# Altium PCB B302BA-PCIe.PcbDoc
Units mm, origin at the board's own origin, x right, y up, seen from the top; angles counter-clockwise.
Board outline 30 x 63 mm, 4 copper layers (Top Layer, Inner Layer 1, Inner Layer 2, Bottom Layer), stack 0.973 mm thick; 44 components, 32 nets, 190 pads, 109 vias.
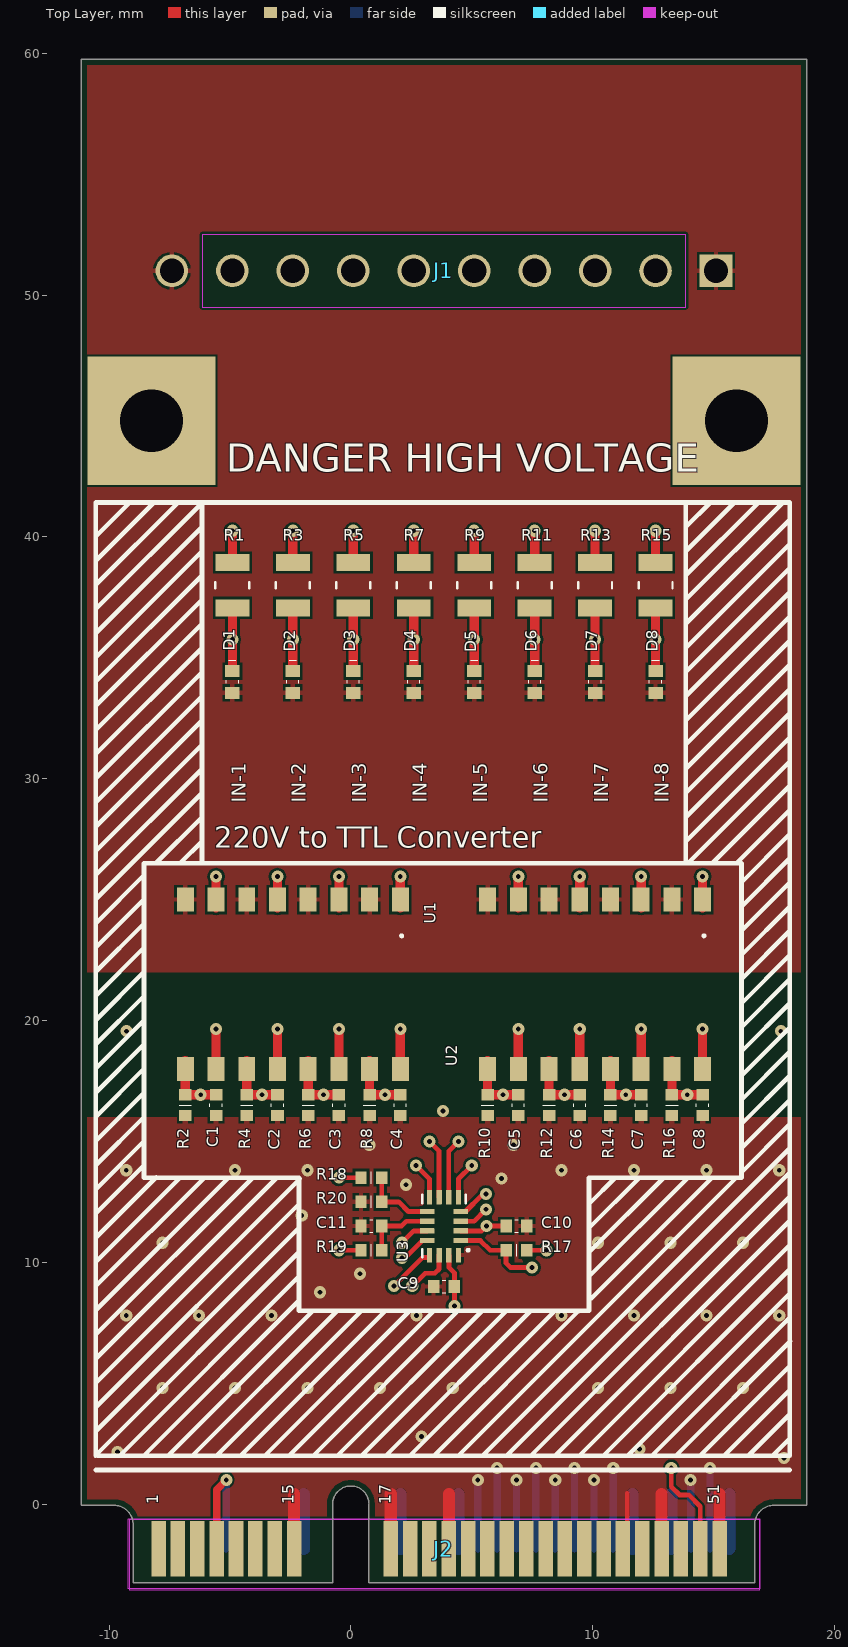
[diagram p0: Top Layer view]
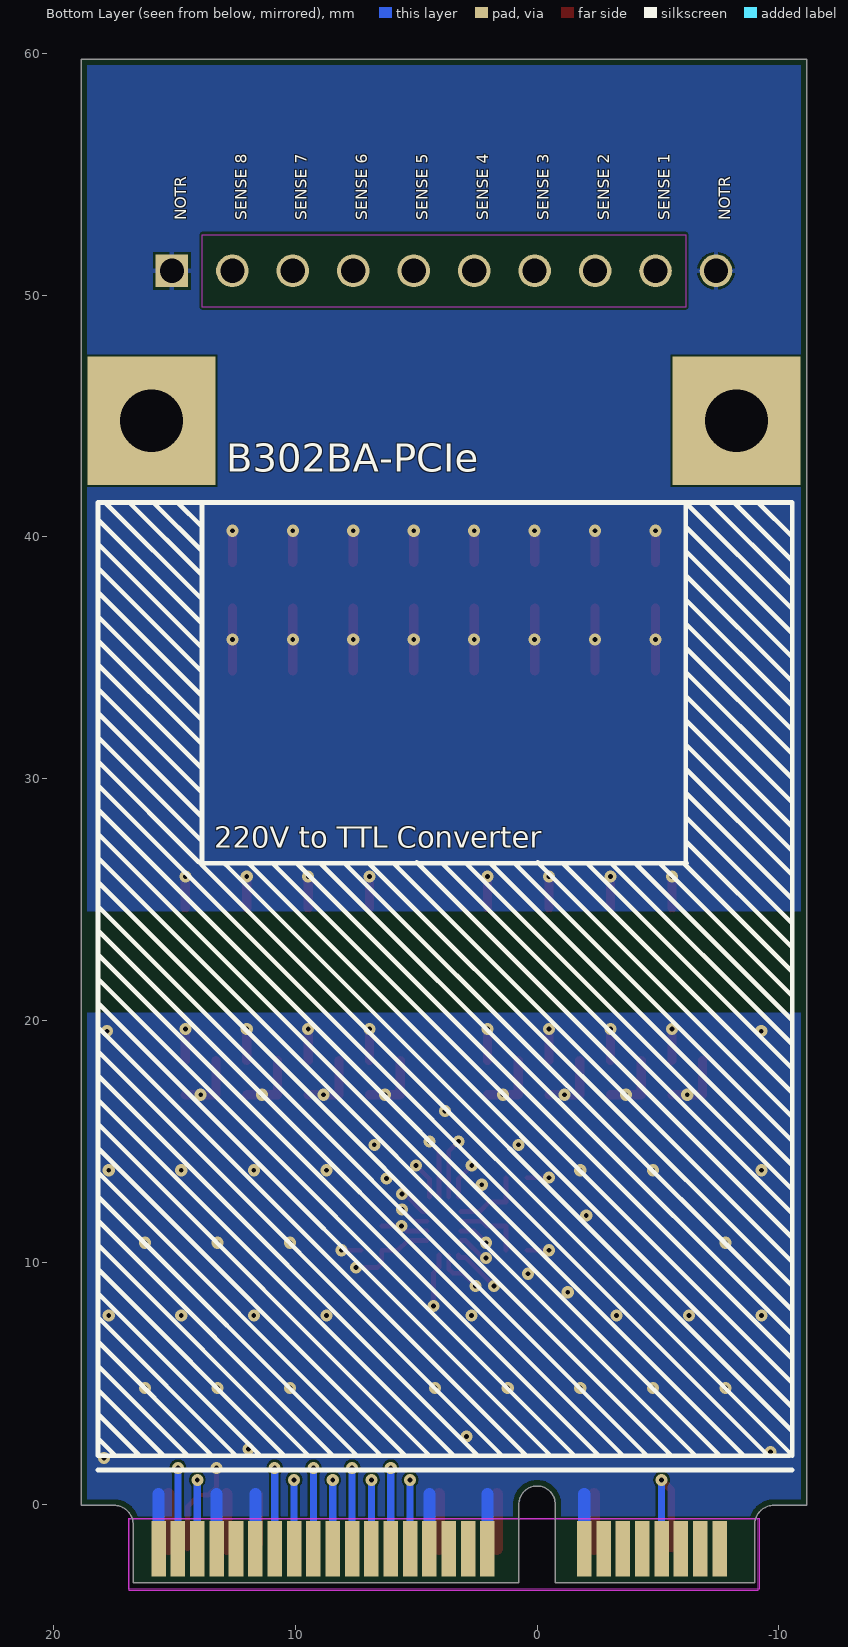
[diagram p1: Bottom Layer view, seen from below]
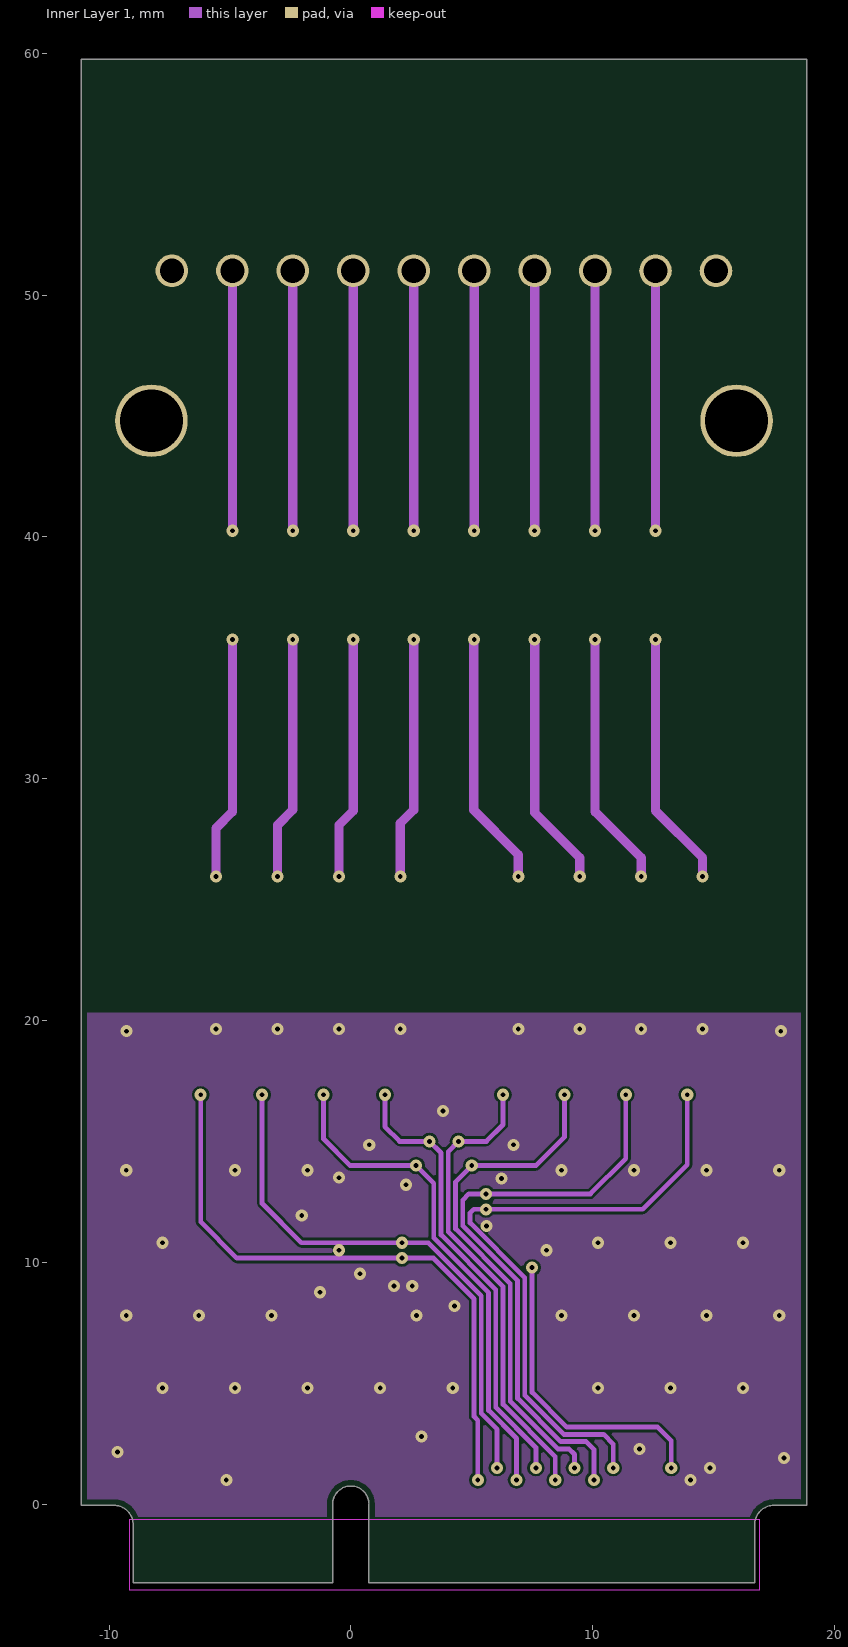
[diagram p2: Inner Layer 1]
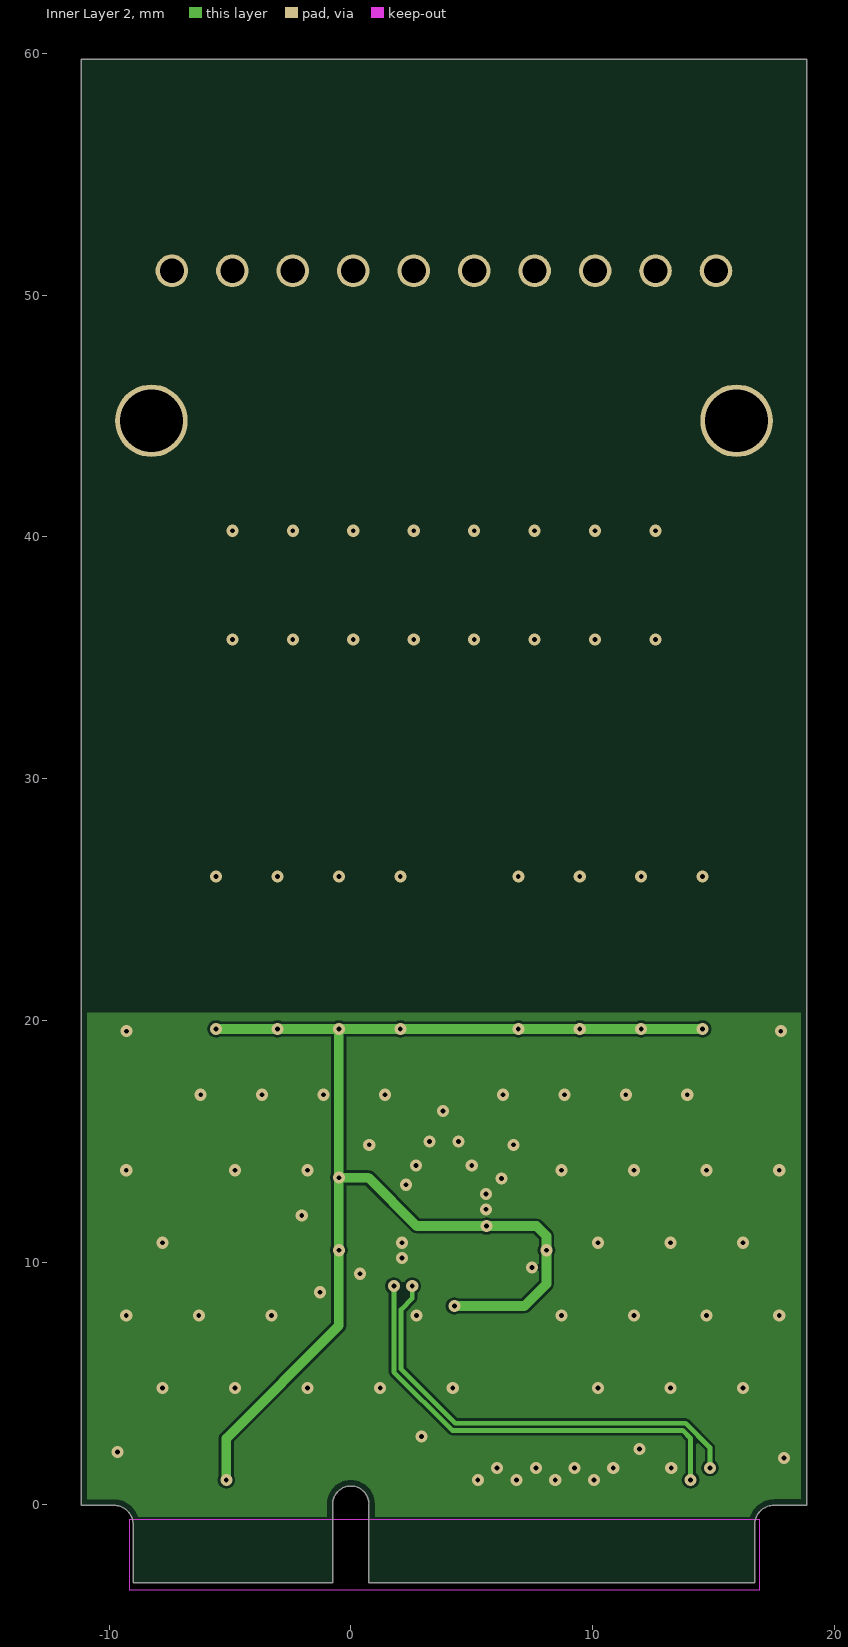
[diagram p3: Inner Layer 2]
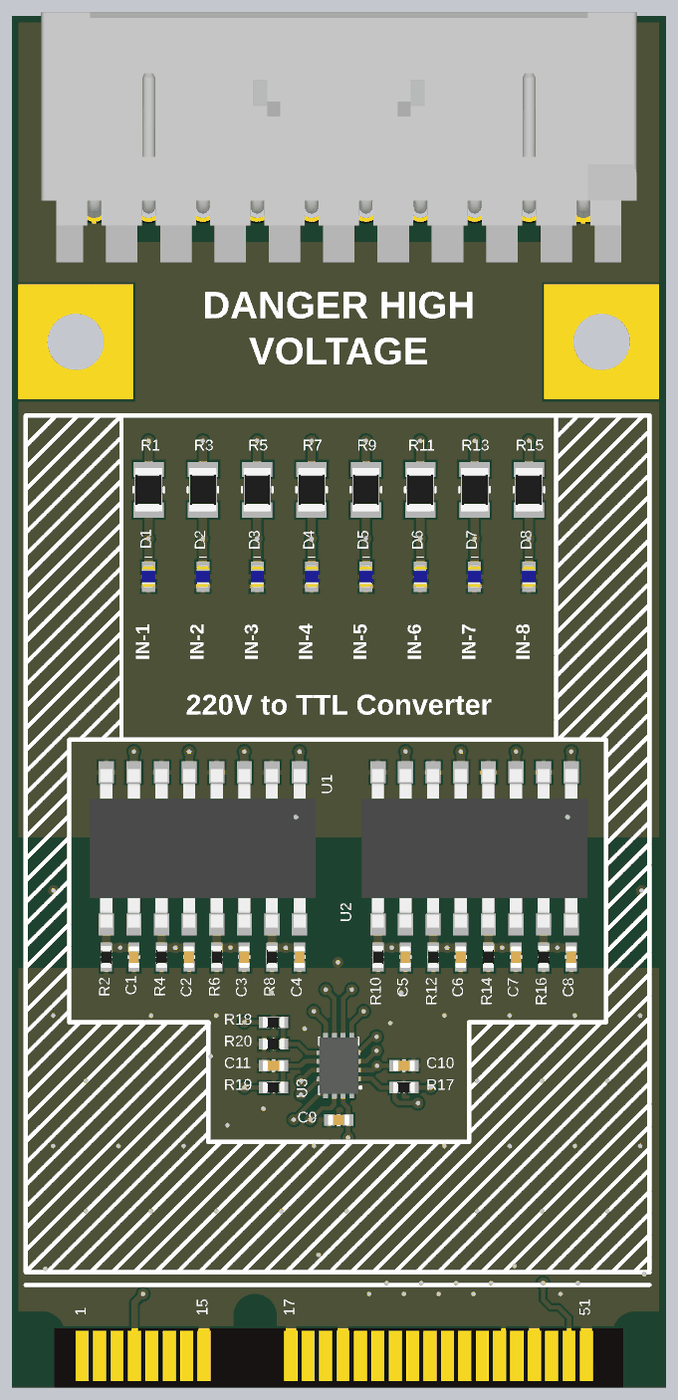
[diagram p4: 3D render of the assembled board from above, using the file's embedded part models]

## Layer stack, top to bottom
Top Solder: solder mask 0.0254, SM-001, Dk 4
Top Layer: signal copper 0.035
Dielectric 2: prepreg 0.1118, PP-015, Dk 4.3
Inner Layer 1: signal copper 0.035
Dielectric 1: core 0.6096, Core-038, Dk 4.6
Inner Layer 2: signal copper 0.035
Dielectric 3: prepreg 0.1118, PP-015, Dk 4.3
Bottom Layer: signal copper 0.035
Bottom Solder: solder mask 0.0254, SM-001, Dk 4

## Board outline
-9.8,-0.05 cw(c-9.8,-0.85) -9,-0.85 -9,-3.25 -0.75,-3.25 -0.75,0 cw(c0,0) 0.75,0 0.75,-3.25 16.7,-3.25 16.7,-0.85 cw(c17.5,-0.85) 17.5,-0.05 18.85,-0.05 18.85,59.75 -11.15,59.75 -11.15,-0.05

## Design rules (kind name [scope] priority, off if disabled: settings)
BoardOutlineClearance [All] p1: gap=0.25 ignorepadtopadclearanceinfootprint=FALSE except(0: Arc-SplitContinuation Track-SplitContinuation SMDPad-SplitContinuation THPad-SplitContinuation Via-SplitContinuation Fill-SplitContinuation Poly-SplitContinuation Region-SplitContinuation Text-SplitContinuation)
Clearance Clearance-xPP-xTP-xTT [All] p1: gap=0.1 ignorepadtopadclearanceinfootprint=FALSE except(0: Arc-Hole Track-Hole SMDPad-Hole THPad-Hole Via-Hole Fill-Hole Poly-Hole Region-Hole Text-Hole)
ComponentClearance [All] p1: gap=0.25 collisioncheckmode=3 verticalgap=0.25 showdistances=FALSE
DiffPairsRouting [All] p1: maxlimit=0.25 minlimit=0.25 mostfreqgap=0.25 toplayer_minwidth=0.381 toplayer_maxwidth=0.381 toplayer_prefwidth=0.381 midlayer1_minwidth=0.381 midlayer1_maxwidth=0.381 midlayer1_prefwidth=0.381 midlayer2_minwidth=0.381 midlayer2_maxwidth=0.381 midlayer2_prefwidth=0.381 bottomlayer_minwidth=0.381 bottomlayer_maxwidth=0.381 bottomlayer_prefwidth=0.381 maxuncoupledlength=12.5
Height [All] p1: minheight=0 maxheight=25 prefheight=12.5
HoleSize HoleSize-PTH [All] p1: absolutevalues=TRUE maxlimit=5 minlimit=0.15 maxpercent=80.000 minpercent=20.000
HoleToHoleClearance [All] p1: gap=0.35 allowstackedmicrovias=TRUE
MinimumAnnularRing "Minimum IAR  <= 0.45mm" [((ObjectKind = 'Pad') OR (ObjectKind = 'Via')) And (Layer = 'MultiLayer') And (HoleDiameter <= AsMM(0.45))] p1: minimumring=0.125 // minimum inner annular ring for pads <= 0.45mm finished hole size
MinimumAnnularRing "Minimum IAR  > 0.45mm" [((ObjectKind = 'Pad') OR (ObjectKind = 'Via')) And (Layer = 'MultiLayer') And (HoleDiameter > AsMM(0.45))] p2: minimumring=0.125 // minimum inner annular ring for pads > 0.45mm finished hole size
MinimumAnnularRing Minimum-IAR [All] p3: minimumring=0.125
MinimumSolderMaskSliver [All] p1: minsoldermaskwidth=0.08
PlaneClearance [InNet('ANT_GSM')] p1: clearance=0.05
PlaneClearance PlaneClearance-IPI [All] p2: clearance=0.25
PlaneConnect [All] p1: planeconnectstyle=Relief reliefexpansion=0.175 reliefentries=4 reliefconductorwidth=0.2 reliefairgap=0.1
PolygonConnect PolygonConnect_Via [All vs (ObjectKind = 'Via') And (HoleDiameter <= AsMM(0.45))] p1: connectstyle=Direct reliefconductorwidth=0.254 reliefentries=4 polygonreliefangle="90 Angle" airgapwidth=0.254
PolygonConnect PolygonConnect-xTW [All] p2: connectstyle=Relief reliefconductorwidth=0.2 reliefentries=4 polygonreliefangle="90 Angle" airgapwidth=0.1
RoutingCorners [All] p1: cornerstyle=45-Degree minsetback=2.5 maxsetback=2.5
RoutingVias "RoutingVias <= 0.45mm" [(ObjectKind = 'Via') And (HoleDiameter <= AsMM(0.45))] p1: holewidth=0.2 width=0.55 viastyle="Through Hole" minholewidth=0.15 minwidth=0.5 maxholewidth=0.45 maxwidth=0.8
RoutingVias "RoutingVias > 0.45mm" [(ObjectKind = 'Via') And (HoleDiameter > AsMM(0.45))] p2: holewidth=0.5 width=0.85 viastyle="Through Hole" minholewidth=0.5 minwidth=0.85 maxholewidth=0.9 maxwidth=1.25
SilkToSilkClearance [All] p1: silktosilkclearance=0.2
SilkToSolderMaskClearance SilkscreenOverComponentPads [IsPad] p1: minsilkscreentomaskgap=0.1 clearancetoexposedcopper=TRUE
SolderMaskExpansion SolderMaskExpansion_Via [(ObjectKind = 'Via') And (HoleDiameter <= AsMM(0.45))] p1: expansion=0.01 istentingtop=TRUE soldermaskfromhole=TRUE
SolderMaskExpansion [All] p2: expansion=0.01 istentingtop=FALSE
SupplyNets "Schematic Supply Nets_1" [InNetClass('HV')] p1: voltage=220,0
SupplyNets "Schematic Supply Nets" [InNet('3V3')] p2: voltage=3,300
UnRoutedNet [All] p1: checkbadconnections=TRUE
Width Width-xTW [All] p1: maxlimit=1.5 minlimit=0.1 preferedwidth=0.2
18 further rules are at their usual default settings.

## Classes and differential pairs
component class "I2C I/O Expander": C9 C10 C11 R17 R18 R19 R20 U3
net class HV: 220V_SENSE_1 220V_SENSE_2 220V_SENSE_3 220V_SENSE_4 220V_SENSE_5 220V_SENSE_6 220V_SENSE_7 220V_SENSE_8
component class "Optic Isolator 8": C8 D8 R15 R16 U2
component class "Optic Isolator 7": C7 D7 R13 R14
component class "Optic Isolator 6": C6 D6 R11 R12
component class "Optic Isolator 5": C5 D5 R9 R10
component class "Optic Isolator 4": C4 D4 R7 R8 U1
component class "Optic Isolator 3": C3 D3 R5 R6
component class "Optic Isolator 2": C2 D2 R3 R4
component class "Optic Isolator 1": C1 D1 R1 R2

## Components (designator, comment, footprint, x,y, rotation, side; value= is the part's Value field where it differs from the comment)
C1 "Capacitor - 4.7uF [0402] (Ceramic)" CAPACITOR_0402 -5.575,16.5 r90 top value=4.7uF
C2 "Capacitor - 4.7uF [0402] (Ceramic)" CAPACITOR_0402 -3.035,16.5 r90 top value=4.7uF
C3 "Capacitor - 4.7uF [0402] (Ceramic)" CAPACITOR_0402 -0.495,16.5 r90 top value=4.7uF
C4 "Capacitor - 4.7uF [0402] (Ceramic)" CAPACITOR_0402 2.045,16.5 r90 top value=4.7uF
C5 "Capacitor - 4.7uF [0402] (Ceramic)" CAPACITOR_0402 6.925,16.5 r90 top value=4.7uF
C6 "Capacitor - 4.7uF [0402] (Ceramic)" CAPACITOR_0402 9.465,16.5 r90 top value=4.7uF
C7 "Capacitor - 4.7uF [0402] (Ceramic)" CAPACITOR_0402 12.005,16.5 r90 top value=4.7uF
C8 "Capacitor - 4.7uF [0402] (Ceramic)" CAPACITOR_0402 14.545,16.5 r90 top value=4.7uF
C9 "Capacitor - 100nF [0402] (Ceramic)" CAPACITOR_0402 3.85,9 r0 top value=100nF
C10 "Capacitor - 100nF [0402] (Ceramic)" CAPACITOR_0402 6.85,11.5 r180 top value=100nF
C11 "Capacitor - 100nF [0402] (Ceramic)" CAPACITOR_0402 0.85,11.5 r0 top value=100nF
D1 "SMD LED (Green)" LED_0402 -4.9,34 r270 top
D2 "SMD LED (Green)" LED_0402 -2.4,34 r270 top
D3 "SMD LED (Green)" LED_0402 0.1,34 r270 top
D4 "SMD LED (Green)" LED_0402 2.6,34 r270 top
D5 "SMD LED (Green)" LED_0402 5.1,34 r270 top
D6 "SMD LED (Green)" LED_0402 7.6,34 r270 top
D7 "SMD LED (Green)" LED_0402 10.1,34 r270 top
D8 "SMD LED (Green)" LED_0402 12.6,34 r270 top
J1 "53426-1010" "Connector 10P (2.54)" 3.85,51 r180 top
J2 "Connector - Mini PCI-E [Add-on]" "PCB - Mini PCI Express" 0,0 r0 top
R1 "220K - 0805 - %5 - 1/16W" RESISTOR_0805 -4.9,38 r90 top value=220K
R2 "47K - 0402 - %1 - 1/16W" RESISTOR_0402 -6.845,16.5 r90 top value=47K
R3 "220K - 0805 - %5 - 1/16W" RESISTOR_0805 -2.4,38 r90 top value=220K
R4 "47K - 0402 - %1 - 1/16W" RESISTOR_0402 -4.305,16.5 r90 top value=47K
R5 "220K - 0805 - %5 - 1/16W" RESISTOR_0805 0.1,38 r90 top value=220K
R6 "47K - 0402 - %1 - 1/16W" RESISTOR_0402 -1.765,16.5 r90 top value=47K
R7 "220K - 0805 - %5 - 1/16W" RESISTOR_0805 2.6,38 r90 top value=220K
R8 "47K - 0402 - %1 - 1/16W" RESISTOR_0402 0.775,16.5 r90 top value=47K
R9 "220K - 0805 - %5 - 1/16W" RESISTOR_0805 5.1,38 r90 top value=220K
R10 "47K - 0402 - %1 - 1/16W" RESISTOR_0402 5.655,16.5 r90 top value=47K
R11 "220K - 0805 - %5 - 1/16W" RESISTOR_0805 7.6,38 r90 top value=220K
R12 "47K - 0402 - %1 - 1/16W" RESISTOR_0402 8.195,16.5 r90 top value=47K
R13 "220K - 0805 - %5 - 1/16W" RESISTOR_0805 10.1,38 r90 top value=220K
R14 "47K - 0402 - %1 - 1/16W" RESISTOR_0402 10.735,16.5 r90 top value=47K
R15 "220K - 0805 - %5 - 1/16W" RESISTOR_0805 12.6,38 r90 top value=220K
R16 "47K - 0402 - %1 - 1/16W" RESISTOR_0402 13.275,16.5 r90 top value=47K
R17 "47K - 0402 - %1 - 1/16W" RESISTOR_0402 6.85,10.5 r0 top value=47K
R18 "47K - 0402 - %1 - 1/16W" RESISTOR_0402 0.85,13.5 r180 top value=47K
R19 "47K - 0402 - %1 - 1/16W" RESISTOR_0402 0.85,10.5 r180 top value=47K
R20 "47K - 0402 - %1 - 1/16W" RESISTOR_0402 0.85,12.5 r0 top value=47K
U1 "TCMT4100" SO-16 -2.4,21.5 r270 top
U2 "TCMT4100" SO-16 10.1,21.5 r270 top
U3 "FXL6408UMX" 16-UFQFN 3.85,11.5 r180 top

## Footprints (in the part's own frame and the unit in brackets; to place one, negate y for a bottom-side part, rotate by r counter-clockwise, add the part's x,y. Pads: shape width x height; smd on the part's side, far side on the other; paste and mask are expansions set on the pad)
16-UFQFN [mm]
  rrect6% 0.6x0.22 smd mask+0.01: 1(-0.7,0.6) 2(-0.7,0.2) 3(-0.7,-0.2) 4(-0.7,-0.6) 9(0.7,-0.6) 10(0.7,-0.2) 11(0.7,0.2) 12(0.7,0.6)
  rrect6% 0.22x0.6 smd mask+0.01: 5(-0.6,-1.2) 6(-0.2,-1.2) 7(0.2,-1.2) 8(0.6,-1.2) 13(0.6,1.2) 14(0.2,1.2) 15(-0.2,1.2) 16(-0.6,1.2)
  silkscreen extent -1.05,-1.3 0.9,1.3, body extent -0.9,-1.3 0.9,1.3, height 0.52
CAPACITOR_0402 [mm] "Chip Capacitor, IPC High Density"
  rect 0.47x0.52 smd mask+0.01: 1(-0.43,0) 2(0.43,0)
  silkscreen extent -0.06,-0.25 0.06,0.25, body extent -0.5,-0.25 0.5,0.25, height 0.49
"Connector 10P (2.54)" [mm] "10P Tunic Connector"
  rect 1.35x1.35 / inner round 1.35 / far side rect 1.35x1.35 hole 1 mask+0.076: 1(-11.25,0)
  round 1.35 hole 1 mask+0.076: 2(-8.75,0) 3(-6.25,0) 4(-3.75,0) 5(-1.25,0) 6(1.25,0) 7(3.75,0) 8(6.25,0) 9(8.75,0) 10(11.25,0)
  body extent -13.71,-8.96 13.69,2.54, height 6.65
LED_0402 [mm] "LED, IPC High Density"
  rect 0.5x0.6 smd mask+0.01: 1(-0.45,0) 2(0.45,0)
  silkscreen extent -0.9,-0.25 0.06,0.25, body extent -0.5,-0.3 0.5,0.3, height 0.18
"PCB - Mini PCI Express" [mm]
  rect 0.6x2.3 smd paste-0.9: 1(-7.95,-1.85) 3(-7.15,-1.85) 5(-6.35,-1.85) 7(-5.55,-1.85) 9(-4.75,-1.85) 11(-3.95,-1.85) 13(-3.15,-1.85) 15(-2.35,-1.85) 17(1.65,-1.85) 19(2.45,-1.85) 21(3.25,-1.85) 23(4.05,-1.85) 25(4.85,-1.85) 27(5.65,-1.85) 29(6.45,-1.85) 31(7.25,-1.85) 33(8.05,-1.85) 35(8.85,-1.85) 37(9.65,-1.85) 39(10.45,-1.85) 41(11.25,-1.85) 43(12.05,-1.85) 45(12.85,-1.85) 47(13.65,-1.85) 49(14.45,-1.85) 51(15.25,-1.85)
  rect 0.6x2.3 smd far side paste-0.9: 2(-7.55,-1.85) 4(-6.75,-1.85) 6(-5.95,-1.85) 8(-5.15,-1.85) 10(-4.35,-1.85) 12(-3.55,-1.85) 14(-2.75,-1.85) 16(-1.95,-1.85) 18(2.05,-1.85) 20(2.85,-1.85) 22(3.65,-1.85) 24(4.45,-1.85) 26(5.25,-1.85) 28(6.05,-1.85) 30(6.85,-1.85) 32(7.65,-1.85) 34(8.45,-1.85) 36(9.25,-1.85) 38(10.05,-1.85) 40(10.85,-1.85) 42(11.65,-1.85) 44(12.45,-1.85) 46(13.25,-1.85) 48(14.05,-1.85) 50(14.85,-1.85) 52(15.65,-1.85)
  Top Layer keep-out region: -9.2,-0.6 16.9,-0.6 16.9,-3.5 -9.2,-3.5
  Bottom Layer keep-out region: -9.2,-0.6 16.9,-0.6 16.9,-3.5 -9.2,-3.5
RESISTOR_0402 [mm] "Chip Resistor, IPC High Density"
  rect 0.47x0.52 smd mask+0.01: 1(-0.43,0) 2(0.43,0)
  silkscreen extent 0,-0.25 0,0.25, body extent -0.5,-0.25 0.5,0.25, height 0.35
RESISTOR_0805 [mm] "Chip Resistor, IPC High Density"
  rect 0.7x1.4 smd mask+0.01: 1(-0.935,0) 2(0.935,0)
  silkscreen extent -0.12,-0.7 0.12,0.7, body extent -1,-0.63 1,0.63, height 0.45
SO-16 [mm]
  rect 1x0.7 smd mask+0.01: 1(-3.5,4.445) 2(-3.5,3.175) 3(-3.5,1.905) 4(-3.5,0.635) 5(-3.5,-0.635) 6(-3.5,-1.905) 7(-3.5,-3.175) 8(-3.5,-4.445) 9(3.5,-4.445) 10(3.5,-3.175) 11(3.5,-1.905) 12(3.5,-0.635) 13(3.5,0.635) 14(3.5,1.905) 15(3.5,3.175) 16(3.5,4.445)
  silkscreen extent -2.05,4.45 -1.95,4.55, body extent -3.64,-5.19 3.64,5.19, height 2.11

## Part data
C1 C2 C3 C4 C5 C6 C7 C8: library part "Capacitor - 4.7uF [0402-6V3]", "Multilayer Ceramic Capacitors - SMD - 6V3 4.7uF X5R 0402 20%", Case=0402, Manufacturer Name=KEMET, Manufacturer Part Number=C0402C475M9PACTU, Tolerance=20%, Voltage=6V3
C9 C10 C11: library part "Capacitor - 100nF [0402-6V3]", "Capacitor - 100nF [0402-6V3] (Ceramic)", Case=0402, Manufacturer Name=AVX, Manufacturer Part Number=04026D104KAT4A, Tolerance=%10, Voltage=6V3, ComponentLink1Description=Mouser, ComponentLink1URL=https://www.mouser.com.tr/ProductDetail/AVX/04026D104KAT4A?qs=sGAEpiMZZMs0AnBnWHyRQPg4iYkCw7IMED%2F4kpqgf7w%3D, ComponentLink2Description=DataSheet, ComponentLink2URL=https://www.mouser.com.tr/datasheet/2/40/cx5r-776519.pdf
D1 D2 D3 D4 D5 D6 D7 D8: library part "Diode - LED (0402-Green)", "Standard LEDs - SMD MINI-MOLD ULTRA COMPACT GREEN", Case=0402, Color=Green, Manufacturer Name="ROHM Semiconductor", Manufacturer Part Number=SML-P12MTT86R, ComponentLink1Description=DataSheet, ComponentLink1URL=https://www.mouser.com.tr/datasheet/2/348/sml-p1-e-1139198.pdf, ComponentLink2Description=Mouser, ComponentLink2URL=https://www.mouser.com.tr/ProductDetail/ROHM-Semiconductor/SML-P12U2TT86R?qs=sGAEpiMZZMseGfSY3csMkRIBDsfU3UCXJTULB5gem9Ta%252Bp%252BvZ709fg%3D%3D, ROHS=Yes
J1: library part "Connector - Tunic 10P (2.5)", "2.50mm Pitch Mini-Lock Wire-to-Board Header Right Angle Friction and Positive Lock 10 Circuits", Case=TH, Manufacturer Name=Molex, Manufacturer Part Number=53426-1010, Pitch=2.5mm, Position="10 Position", System=Connector
J2: "Mini PCI-Express gold finger connector.", BUS Type="Mini PCI Express", Mating Connector=TE-1775862-2, Number of Positions=52, Pitch="0.8 mm", System=Connector
R1 R3 R5 R7 R9 R11 R13 R15: library part "Resistor - 220K [0805]", "Thick Film Resistors - SMD 1/2 W 220 KOhm 5%", Case=0805, Manufacturer Name="Vishay Dale", Manufacturer Part Number=CRCW0805220KJNEAHP, Power=1/2W, Tolerance=%5, ComponentLink1Description=DataSheet, ComponentLink1URL=https://www.mouser.com.tr/datasheet/2/427/dcrcwe3-1762152.pdf, ComponentLink2Description=Mouser, ComponentLink2URL=https://www.mouser.com.tr/ProductDetail/Vishay-Dale/CRCW0402330RFKED?qs=sGAEpiMZZMu61qfTUdNhG2DpbjADlD3GGS6SwBlLi5Q%3D
R2 R4 R6 R8 R10 R12 R14 R16 R17 R18 R19 R20: library part "Resistor - 47K [0402]", "Thick Film Resistors - SMD 1/16 W 47 KOhm 1%", Case=0402, Manufacturer Name=Vishay, Manufacturer Part Number=CRCW040247K0FKED, Power=1/16W, Tolerance=%1, ComponentLink1Description=DataSheet, ComponentLink1URL=https://www.mouser.com.tr/datasheet/2/427/dcrcwe3-1762152.pdf, ComponentLink2Description=Mouser, ComponentLink2URL=https://www.mouser.com.tr/ProductDetail/Vishay-Dale/CRCW040247K0FKED?qs=sGAEpiMZZMu61qfTUdNhG2DpbjADlD3GL%252B3h1elTxqU%3D
U1 U2: library part "IC - TCMT4100", "OptpCoupler 4CH 16 Pin (SOP16)", Case=SOP-16, Manufacturer Name="Vishay Semiconductors", Maximum Collector Emitter Saturation Voltage="0.3 V", Vf - Forward Voltage="1.6 V", If - Forward Current="60 mA", Manufacturer Part Number=TCMT4100, Number of Channels="4 Channel"
U3: library part "IC - FXL6408UMX", "IC GPIO EXPANDER I2C 8B 16-UMLP", Case=16-UFQFN, Manufacturer Part Number=OnSemi, Manufacturer Name=FXL6408UMX, Product Type="I/O Expanders"

## Free pads (board coordinates)
  rect 5.3x5.3 / inner round 3 / far side rect 5.3x5.3 hole 2.6: 1(-8.25,44.8) 2(15.95,44.8)

## Via types
v1: diameter 0.5, hole 0.2, Top Layer to Bottom Layer, tented both sides, 109 vias

## Nets (pads, with @x,y where several pads share a name; then routed paths per layer and width w, separated by ;. In a path a pad name is that pad's centre, name@x,y a point inside that pad or via, vN(x,y) a via of type N, cw(c..) or ccw(c..) an arc to the next point about the centre after c; other vN are vias at no path point)
3V3: C9.2 C10.2 J2.7 J2.8 R17.2 R18.2 R19.2 U1.10 U1.12 U1.14 U1.16 U2.10 U2.12 U2.14 U2.16 U3.2 U3.15 | length 79.3
  Top Layer w0.2: v1@-0.387,13.5 R18.2 ; v1@-0.387,10.5 R19.2 ; U3.15 4.06,10.29 4.06,9.78 4.28,9.56 C9.2 v1(4.28,8.193) ; U3.2 5.413,11.3 v1(5.613,11.5) C10.2 ; R17.2 v1(8.087,10.5)
  Top Layer w0.3: J2.7 -5.55,0.6 v1(-5.15,1)
  Top Layer w0.381: U1.10@-5.575,18.35 v1(-5.575,19.65) ; U1.12@-3.035,18.35 v1(-3.035,19.65) ; U1.14@-0.495,18.35 v1(-0.495,19.65) ; U1.16@2.045,18.35 v1(2.045,19.65) ; U2.10@6.925,18.35 v1(6.925,19.65) ; U2.12@9.465,18.35 v1(9.465,19.65) ; U2.14@12.005,18.35 v1(12.005,19.65) ; U2.16@14.545,18.35 v1(14.545,19.65)
  Inner Layer 2 w0.4: v1(-5.575,19.65) v1(-3.035,19.65) v1(-0.495,19.65) ; v1(-5.15,1) -5.15,2.724 -0.495,7.379 v1(-0.495,10.5) v1(-0.495,13.5) ; v1(4.28,8.193) 7.177,8.193 8.087,9.103 v1(8.087,10.5) 8.087,11.09 7.677,11.5 v1(5.613,11.5) 2.724,11.5 0.724,13.5 v1(-0.495,13.5) ; v1(14.545,19.65) v1(12.005,19.65) v1(9.465,19.65) v1(6.925,19.65) v1(2.045,19.65) v1(-0.495,19.65) ; v1(-0.495,13.5) v1(-0.495,19.65)
  Bottom Layer w0.3: J2.8 v1(-5.15,1)
3V3_SENSE_1: C1.2 J2.26 R2.2 U1.9 U3.12 | length 32.3
  Top Layer w0.2: v1(2.112,10.173) 2.169,10.23 2.29,10.23 2.96,10.9 U3.12
  Top Layer w0.381: U1.9@-6.845,18.35 R2.2 v1(-6.21,16.93) C1.2
  Inner Layer 1 w0.2: v1(-6.21,16.93) -6.21,11.671 -4.712,10.173 v1(2.112,10.173) 3.416,10.173 5.093,8.496 5.093,3.627 5.25,3.47 v1(5.25,1)
  Bottom Layer w0.3: J2.26 v1(5.25,1)
3V3_SENSE_2: C2.2 J2.28 R4.2 U1.11 U3.11 | length 29.8
  Top Layer w0.2: v1(2.112,10.808) 2.604,11.3 U3.11
  Top Layer w0.381: U1.11@-4.305,18.35 R4.2 v1(-3.67,16.93) C2.2
  Inner Layer 1 w0.2: v1(-3.67,16.93) -3.67,12.433 -2.045,10.808 v1(2.112,10.808) 3.205,10.808 5.393,8.62 5.393,3.751 6.05,3.094 v1(6.05,1.5)
  Bottom Layer w0.3: J2.28 v1(6.05,1.5)
3V3_SENSE_3: C3.2 J2.30 R6.2 U1.13 U3.8 | length 27.9
  Top Layer w0.2: v1(2.7,14) 3.25,13.45 U3.8
  Top Layer w0.381: U1.13@-1.765,18.35 R6.2 v1(-1.13,16.93) C3.2
  Inner Layer 1 w0.2: v1(-1.13,16.93) -1.13,15.1 -0.03,14 v1(2.7,14) 3.429,13.271 3.429,11.009 5.693,8.745 5.693,3.875 6.85,2.718 v1(6.85,1)
  Bottom Layer w0.3: J2.30 v1(6.85,1)
3V3_SENSE_4: C4.2 J2.32 R8.2 U1.15 U3.7 | length 27.2
  Top Layer w0.2: v1(3.25,15) 3.65,14.6 U3.7
  Top Layer w0.381: U1.15@0.775,18.35 R8.2 v1(1.41,16.93) C4.2
  Inner Layer 1 w0.2: v1(1.41,16.93) 1.41,15.608 2.018,15 v1(3.25,15) 3.729,14.521 3.729,11.133 5.993,8.869 5.993,4 7.65,2.343 v1(7.65,1.5)
  Bottom Layer w0.3: J2.32 v1(7.65,1.5)
3V3_SENSE_5: C5.2 J2.34 R10.2 U2.9 U3.6 | length 27.4
  Top Layer w0.2: U3.6 4.05,14.6 v1(4.45,15)
  Top Layer w0.381: U2.9@5.655,18.35 R10.2 v1(6.29,16.93) C5.2
  Inner Layer 1 w0.2: v1(6.29,16.93) 6.29,15.688 5.602,15 v1(4.45,15) 4.029,14.579 4.029,11.257 6.293,8.993 6.293,4.124 8.45,1.967 v1(8.45,1)
  Bottom Layer w0.3: J2.34 v1(8.45,1)
3V3_SENSE_6: C6.2 J2.36 R12.2 U2.11 U3.5 | length 28.7
  Top Layer w0.2: U3.5 4.45,13.45 v1(5,14)
  Top Layer w0.381: U2.11@8.195,18.35 R12.2 v1(8.83,16.93) C6.2
  Inner Layer 1 w0.2: v1(8.83,16.93) 8.83,15.18 7.65,14 v1(5,14) 4.329,13.329 4.329,11.381 6.593,9.117 6.593,4.248 8.555,2.286 9.017,2.286 9.25,2.053 v1(9.25,1.5)
  Bottom Layer w0.3: J2.36 v1(9.25,1.5)
3V3_SENSE_7: C7.2 J2.38 R14.2 U2.13 U3.4 | length 31.4
  Top Layer w0.2: U3.4 4.74,12.1 5.41,12.77 5.531,12.77 v1(5.588,12.827)
  Top Layer w0.381: U2.13@10.735,18.35 R14.2 v1(11.37,16.93) C7.2
  Inner Layer 1 w0.2: v1(10.05,1) 10.05,2.269 9.733,2.586 8.679,2.586 6.893,4.372 6.893,9.242 4.629,11.506 4.629,12.573 4.883,12.827 v1(5.588,12.827) 9.906,12.827 11.37,14.291 v1(11.37,16.93)
  Bottom Layer w0.3: J2.38 v1(10.05,1)
3V3_SENSE_8: C8.2 J2.40 R16.2 U2.15 U3.3 | length 33.9
  Top Layer w0.2: U3.3 5.096,11.7 v1(5.588,12.192)
  Top Layer w0.381: U2.15@13.275,18.35 R16.2 v1(13.91,16.93) C8.2
  Inner Layer 1 w0.2: v1(10.85,1.5) 10.85,2.485 10.449,2.886 8.804,2.886 7.193,4.497 7.193,9.366 4.929,11.63 4.929,12.041 5.08,12.192 v1(5.588,12.192) 12.065,12.192 13.91,14.037 v1(13.91,16.93)
  Bottom Layer w0.3: J2.40 v1(10.85,1.5)
220V_SENSE_1: J1.9 R1.2 | length 12
  Top Layer w0.381: R1.2@-4.9,38.95 v1(-4.9,40.25)
  Inner Layer 1 w0.381: v1(-4.9,40.25) J1.9
220V_SENSE_1_: D1.1 R1.1 U1.7 | length 14
  Top Layer w0.381: U1.7@-5.575,24.65 v1(-5.575,25.95) ; D1.1 v1(-4.9,35.75) R1.1@-4.9,37.05
  Inner Layer 1 w0.381: v1(-5.575,25.95) -5.575,27.953 -4.9,28.628 v1(-4.9,35.75)
220V_SENSE_2: J1.8 R3.2 | length 12
  Top Layer w0.381: R3.2@-2.4,38.95 v1(-2.4,40.25)
  Inner Layer 1 w0.381: v1(-2.4,40.25) J1.8
220V_SENSE_2_: D2.1 R3.1 U1.5 | length 14
  Top Layer w0.381: U1.5@-3.035,24.65 v1(-3.035,25.95) ; D2.1 v1(-2.4,35.75) R3.1@-2.4,37.05
  Inner Layer 1 w0.381: v1(-3.035,25.95) -3.035,28.08 -2.4,28.715 v1(-2.4,35.75)
220V_SENSE_3: J1.7 R5.2 | length 12
  Top Layer w0.381: R5.2@0.1,38.95 v1(0.1,40.25)
  Inner Layer 1 w0.381: v1(0.1,40.25) J1.7
220V_SENSE_3_: D3.1 R5.1 U1.3 | length 13.9
  Top Layer w0.381: U1.3@-0.495,24.65 v1(-0.495,25.95) ; D3.1 v1(0.1,35.75) R5.1@0.1,37.05
  Inner Layer 1 w0.381: v1(-0.495,25.95) -0.495,28.08 0.1,28.675 v1(0.1,35.75)
220V_SENSE_4: J1.6 R7.2 | length 12
  Top Layer w0.381: R7.2@2.6,38.95 v1(2.6,40.25)
  Inner Layer 1 w0.381: v1(2.6,40.25) J1.6
220V_SENSE_4_: D4.1 R7.1 U1.1 | length 14
  Top Layer w0.381: U1.1@2.045,24.65 v1(2.045,25.95) ; D4.1 v1(2.6,35.75) R7.1@2.6,37.05
  Inner Layer 1 w0.381: v1@2.045,25.921 2.045,28.155 2.6,28.71 v1(2.6,35.75)
220V_SENSE_5: J1.5 R9.2 | length 12
  Top Layer w0.381: R9.2@5.1,38.95 v1(5.1,40.25)
  Inner Layer 1 w0.381: v1(5.1,40.25) J1.5
220V_SENSE_5_: D5.1 R9.1 U2.7 | length 14.4
  Top Layer w0.381: D5.1 R9.1@5.1,37.05 ; U2.7@6.925,24.65 v1(6.925,25.95)
  Inner Layer 1 w0.381: v1@5.08,35.695 5.08,28.702 6.925,26.857 v1(6.925,25.95)
  other v1: 5.1,35.75
220V_SENSE_6: J1.4 R11.2 | length 12
  Top Layer w0.381: R11.2@7.6,38.95 v1(7.6,40.25)
  Inner Layer 1 w0.381: v1(7.6,40.25) J1.4
220V_SENSE_6_: D6.1 R11.1 U2.5 | length 14.5
  Top Layer w0.381: D6.1 R11.1@7.6,37.05 ; U2.5@9.465,24.65 v1(9.465,25.95)
  Inner Layer 1 w0.381: v1(7.6,35.75) 7.6,28.595 9.465,26.73 v1(9.465,25.95)
220V_SENSE_7: J1.3 R13.2 | length 12
  Top Layer w0.381: R13.2@10.1,38.95 v1(10.1,40.25)
  Inner Layer 1 w0.381: v1(10.1,40.25) J1.3
220V_SENSE_7_: D7.1 R13.1 U2.3 | length 14.5
  Top Layer w0.381: D7.1 R13.1@10.1,37.05 ; U2.3@12.005,24.65 v1(12.005,25.95)
  Inner Layer 1 w0.381: v1@10.1,35.718 10.1,28.635 12.005,26.73 v1(12.005,25.95)
  other v1: 10.1,35.75
220V_SENSE_8: J1.2 R15.2 | length 12
  Top Layer w0.381: R15.2@12.6,38.95 v1(12.6,40.25)
  Inner Layer 1 w0.381: v1(12.6,40.25) J1.2
220V_SENSE_8_: D8.1 R15.1 U2.1 | length 14.5
  Top Layer w0.381: D8.1 R15.1@12.6,37.05 ; U2.1@14.545,24.65 v1(14.545,25.95)
  Inner Layer 1 w0.381: v1(12.6,35.75) 12.6,28.675 14.545,26.73 v1(14.545,25.95)
GND: C1.1 C2.1 C3.1 C4.1 C5.1 C6.1 C7.1 C8.1 C9.1 C10.1 C11.1 J2.15 J2.16 J2.17 J2.18 J2.23 J2.24 J2.41 J2.42 J2.45 J2.46 J2.51 J2.52 R2.1 R4.1 R6.1 R8.1 R10.1 R12.1 R14.1 R16.1 R20.1 U3.16 | length 27.2
  Top Layer w0.2: J2.41@11.43,-1.67 11.43,0.453
  Top Layer w0.5: J2.15 -2.35,0.426 ; J2.17 1.65,0.426 ; J2.23 4.05,0.426 ; J2.45 12.85,0.426 ; J2.51 15.25,0.426
  Bottom Layer w0.5: J2.16 -1.95,0.426 ; J2.18 2.05,0.426 ; J2.24 4.45,0.426 ; J2.42 11.65,0.426 ; J2.46 13.25,0.426 ; J2.52 15.65,0.426
  other v1: 17.907,1.905 -9.652,2.159 11.938,2.286 2.921,2.794 -7.787,4.807 -4.787,4.807 -1.787,4.807 1.213,4.807 4.213,4.807 10.213,4.807 13.213,4.807 16.213,4.807 -9.287,7.807 -6.287,7.807 -3.287,7.807 2.713,7.807 8.713,7.807 11.713,7.807 14.713,7.807 17.713,7.807 -1.27,8.763 0.381,9.525 -7.787,10.807 10.213,10.807 13.213,10.807 16.213,10.807 -2.032,11.938 2.286,13.208 6.223,13.462 -9.287,13.807 -4.787,13.807 -1.787,13.807 8.713,13.807 11.713,13.807 14.713,13.807 17.713,13.807 0.762,14.859 6.731,14.859 3.81,16.256 -9.271,19.558 17.78,19.558
I2C_SCL: J2.48 U3.13 | length 23.6
  Top Layer w0.2: v1(1.778,9.017) 2.957,10.196 3.24,10.196 3.25,10.206 U3.13
  Inner Layer 2 w0.2: v1(1.778,9.017) 1.778,5.461 4.191,3.048 13.716,3.048 14.05,2.714 v1(14.05,1)
  Bottom Layer w0.3: J2.48 v1(14.05,1)
I2C_SDA: J2.50 U3.14 | length 23.9
  Top Layer w0.2: v1(2.54,9.017) 3.068,9.545 3.473,9.545 3.65,9.723 U3.14
  Inner Layer 2 w0.2: v1(2.54,9.017) 2.54,8.509 2.078,8.047 2.078,5.585 4.315,3.348 13.84,3.348 14.85,2.338 v1(14.85,1.5)
  Bottom Layer w0.3: J2.50 v1(14.85,1.5)
I\2\C\_\I\N\T\: J2.49 R17.1 U3.1 | length 20.7
  Top Layer w0.2: U3.1 5.356,10.9 5.756,10.5 R17.1 6.42,9.963 6.604,9.779 v1(7.493,9.779) ; v1(13.25,1.5) 13.25,0.72 13.589,0.381 13.97,0.381 14.45,-0.099 J2.49
  Inner Layer 1 w0.2: v1(7.493,9.779) 7.493,4.621 8.928,3.186 12.689,3.186 13.25,2.625 v1(13.25,1.5)
IC_ADDR: R18.1 R20.2 U3.9 | length 3
  Top Layer w0.2: R18.1 R20.2 1.978,12.5 2.378,12.1 U3.9
IC_RST: C11.2 R19.1 U3.10 | length 3
  Top Layer w0.2: R19.1 C11.2 2.088,11.5 2.288,11.7 U3.10
NOTR: D1.2 D2.2 D3.2 D4.2 D5.2 D6.2 D7.2 D8.2 J1.1 J1.10 U1.2 U1.4 U1.6 U1.8 U2.2 U2.4 U2.6 U2.8
pads on no net: J2.1 J2.2 J2.3 J2.4 J2.5 J2.6 J2.9 J2.10 J2.11 J2.12 J2.13 J2.14 J2.19 J2.20 J2.21 J2.22 J2.25 J2.27 J2.29 J2.31 J2.33 J2.35 J2.37 J2.39 J2.43 J2.44 J2.47

## Polygon pours and split planes (outlines as drawn)
NOTR on Top Layer "NOTR_L01_P001" (solid, remove dead copper, pour order 1): 18.85,22 18.85,59.75 -11.15,59.75 -11.15,22
GND on Top Layer "GND_L01_P000" (solid, remove dead copper, pour order 0): -9.8,-0.05 cw(c-9.8,-0.85) -9,-0.85 -9,-3.25 -0.75,-3.25 -0.75,0 cw(c0,0) 0.75,0 0.75,-3.25 16.7,-3.25 16.7,-0.85 cw(c17.5,-0.85) 17.5,-0.05 18.85,-0.05 18.85,16 -11.15,16 -11.15,-0.05
GND on Bottom Layer "GND_L04_P005" (solid, remove dead copper, pour order 5): -9.8,-0.05 cw(c-9.8,-0.85) -9,-0.85 -9,-3.25 -0.75,-3.25 -0.75,0 cw(c0,0) 0.75,0 0.75,-3.25 16.7,-3.25 16.7,-0.85 cw(c17.5,-0.85) 17.5,-0.05 18.85,-0.05 18.85,20.32 -11.15,20.32 -11.15,-0.05
NOTR on Bottom Layer "NOTR_L04_P003" (solid, remove dead copper, pour order 3): 18.85,24.511 18.85,59.75 -11.15,59.75 -11.15,24.511
GND on Inner Layer 1 "GND_L02_P002" (solid, remove dead copper, pour order 2): -9.8,-0.05 cw(c-9.8,-0.85) -9,-0.85 -9,-3.25 -0.75,-3.25 -0.75,0 cw(c0,0) 0.75,0 0.75,-3.25 16.7,-3.25 16.7,-0.85 cw(c17.5,-0.85) 17.5,-0.05 18.85,-0.05 18.85,20.32 -11.15,20.32 -11.15,-0.05
GND on Inner Layer 2 "GND_L03_P006" (solid, remove dead copper, pour order 6): -9.8,-0.05 cw(c-9.8,-0.85) -9,-0.85 -9,-3.25 -0.75,-3.25 -0.75,0 cw(c0,0) 0.75,0 0.75,-3.25 16.7,-3.25 16.7,-0.85 cw(c17.5,-0.85) 17.5,-0.05 18.85,-0.05 18.85,20.32 -11.15,20.32 -11.15,-0.05

## Keep-outs
Top Layer:
  rectangle: -6.15,49.5 13.85,52.5
Bottom Layer:
  rectangle: -6.15,49.5 13.85,52.5
Keep-Out Layer:
  region: -9.144,-3.556 -9.144,-0.635 16.891,-0.635 16.891,-3.556

## Silkscreen, mask and mechanical layers (free items; w line width, h text height)
Top Overlay:
  lines w0.18: -10.557,2.007 -2.151,10.413 ; -10.55,3.014 -2.151,11.413 ; -10.55,5.014 -2.107,13.457 ; -10.55,6.014 -3.064,13.5 ; -10.549,7.018 -4.058,13.5 ; -10.55,10.014 -7.064,13.5 ; -10.55,11.014 -8.05,13.514 ; -10.55,12.014 -8.55,14.014 ; -10.55,13.014 -8.55,15.014 ; -10.55,14.014 -8.55,16.014 ; -10.55,15.014 -8.55,17.014 ; -10.55,16.014 -8.55,18.014 ; -10.55,17.014 -8.55,19.014 ; -10.55,18.014 -8.55,20.014 ; -10.55,19.014 -8.55,21.014 ; -10.55,20.014 -8.55,22.014 ; -10.55,21.014 -8.55,23.014 ; -10.55,22.014 -8.55,24.014 ; -10.55,23.014 -8.55,25.014 ; -10.55,24.014 -8.55,26.014 ; -10.55,25.014 -6.15,29.414 ; -10.55,26.014 -6.15,30.414 ; -10.55,27.014 -6.15,31.414 ; -10.55,28.014 -6.15,32.414 ; -10.55,29.014 -6.15,33.414 ; -10.55,30.014 -6.15,34.414 ; -10.55,31.014 -6.15,35.414 ; -10.55,32.014 -6.15,36.414 ; -10.55,33.014 -6.15,37.414 ; -10.55,34.014 -6.15,38.414 ; -10.55,35.014 -6.15,39.414 ; -10.55,36.014 -6.15,40.414 ; -10.55,37.014 -6.15,41.414 ; -10.55,38.014 -7.15,41.414 ; -10.55,39.014 -8.15,41.414 ; -10.55,40.014 -9.15,41.414 ; -10.549,8.017 -5.058,13.5 ; -10.548,9.016 -6.058,13.5 ; -10.533,4.031 -2.15,12.414 ; -9.55,2.014 -2.151,9.413 ; -8.55,2.014 -2.151,8.413 ; -8.064,26.5 -6.15,28.414 ; -7.55,2.014 -1.564,8 ; -7.064,26.5 -6.15,27.414 ; -6.55,2.014 -0.564,8 ; -5.55,2.014 0.436,8 ; -4.55,2.014 1.436,8 ; -3.55,2.014 2.436,8 ; -2.55,2.014 3.436,8 ; -1.55,2.014 4.436,8 ; -0.55,2.014 5.436,8 ; 0.45,2.014 6.436,8 ; 1.45,2.014 7.436,8 ; 2.45,2.014 8.436,8 ; 3.45,2.014 9.418,7.981 ; 4.45,2.014 15.887,13.45 ; 5.45,2.014 18.15,14.714 ; 6.45,2.014 18.15,13.714 ; 7.45,2.014 18.15,12.714 ; 8.45,2.014 18.15,11.714 ; 9.45,2.014 18.15,10.714 ; 9.85,9.414 13.936,13.5 ; 9.85,10.414 12.936,13.5 ; 9.85,11.414 11.936,13.5 ; 9.85,12.414 10.936,13.5 ; 9.926,8.489 14.936,13.5 ; 10.45,2.014 18.15,9.714 ; 11.45,2.014 18.15,8.714 ; 12.45,2.014 18.15,7.714 ; 13.45,2.014 18.167,6.731 ; 13.85,27.407 18.15,31.707 ; 13.85,28.407 18.15,32.707 ; 13.85,29.407 18.15,33.707 ; 13.85,30.407 18.15,34.707 ; 13.85,31.407 18.15,35.707 ; 13.85,32.407 18.15,36.707 ; 13.85,33.407 18.15,37.707 ; 13.85,34.407 18.15,38.707 ; 13.85,35.407 18.15,39.707 ; 13.85,36.407 18.15,40.707 ; 13.85,37.407 17.857,41.414 ; 13.85,38.407 16.857,41.414 ; 13.85,39.407 15.857,41.414 ; 13.85,40.407 14.857,41.414 ; 13.986,26.543 18.15,30.707 ; 14.433,1.997 18.15,5.714 ; 14.943,26.5 18.15,29.707 ; 15.433,1.997 18.15,4.714 ; 15.943,26.5 18.15,28.707 ; 16.15,13.714 18.15,15.714 ; 16.15,14.714 18.15,16.714 ; 16.15,15.714 18.15,17.714 ; 16.15,16.714 18.15,18.714 ; 16.15,17.714 18.15,19.714 ; 16.15,18.714 18.15,20.714 ; 16.15,19.714 18.15,21.714 ; 16.15,20.707 18.15,22.707 ; 16.15,21.707 18.15,23.707 ; 16.15,22.707 18.15,24.707 ; 16.15,23.707 18.15,25.707 ; 16.15,24.707 18.15,26.707 ; 16.15,25.707 18.15,27.707 ; 16.433,1.997 18.15,3.714 ; 17.433,1.997 18.15,2.714
  lines w0.2: -10.55,1.413 18.15,1.413 ; -10.55,2 -10.55,41.414 18.15,41.414 18.15,2 -10.452,2 ; -6.15,26.543 -6.15,41.414 ; -2.15,13.408 -2.15,8 9.85,8 9.85,13.5 16.15,13.5 16.15,26.5 -8.55,26.5 -8.55,13.5 -2.15,13.5 ; 13.85,26.543 13.85,41.414
  text "DANGER HIGH VOLTAGE" at -5.15,42.3 h2
  text "IN-1" at -4.15,29 h1 r90
  text "IN-2" at -1.65,29 h1 r90
  text "IN-3" at 0.85,29 h1 r90
  text "IN-4" at 3.35,29 h1 r90
  text "IN-5" at 5.85,29 h1 r90
  text "IN-6" at 8.35,29 h1 r90
  text "IN-7" at 10.85,29 h1 r90
  text "IN-8" at 13.35,29 h1 r90
  text "220V to TTL Converter" at -5.65,26.85 h1.5
Bottom Overlay:
  lines w0.18: -10.557,2.007 13.893,26.457 ; -10.55,3.014 12.903,26.467 ; -10.55,5.014 10.936,26.5 ; -10.55,6.014 9.893,26.457 ; -10.549,7.018 8.921,26.46 ; -10.55,10.014 5.893,26.457 ; -10.55,11.014 4.979,26.543 ; -10.55,12.014 3.936,26.5 ; -10.55,13.014 2.896,26.46 ; -10.55,14.014 1.898,26.462 ; -10.55,15.014 0.936,26.5 ; -10.55,16.014 -0.021,26.543 ; -10.55,17.014 -1.104,26.46 ; -10.55,18.014 -2.104,26.46 ; -10.55,19.014 -3.104,26.46 ; -10.55,20.014 -4.064,26.5 ; -10.55,21.014 -5.102,26.462 ; -10.55,22.014 -6.064,26.5 ; -10.55,23.014 -6.15,27.414 ; -10.55,24.014 -6.15,28.414 ; -10.55,25.014 -6.15,29.414 ; -10.55,26.014 -6.15,30.414 ; -10.55,27.014 -6.15,31.414 ; -10.55,28.014 -6.15,32.414 ; -10.55,29.014 -6.15,33.414 ; -10.55,30.014 -6.15,34.414 ; -10.55,31.014 -6.15,35.414 ; -10.55,32.014 -6.15,36.414 ; -10.55,33.014 -6.15,37.414 ; -10.55,34.014 -6.15,38.414 ; -10.55,35.014 -6.15,39.414 ; -10.55,36.014 -6.15,40.414 ; -10.55,37.014 -6.15,41.414 ; -10.55,38.014 -7.15,41.414 ; -10.55,39.014 -8.15,41.414 ; -10.55,40.014 -9.15,41.414 ; -10.549,8.017 7.964,26.504 ; -10.548,9.016 6.922,26.462 ; -10.533,4.031 11.895,26.459 ; -9.55,2.014 18.15,29.714 ; -8.55,2.014 18.15,28.714 ; -7.55,2.014 18.15,27.714 ; -6.55,2.014 18.15,26.714 ; -5.55,2.014 18.15,25.714 ; -4.55,2.014 18.15,24.714 ; -3.55,2.014 18.15,23.714 ; -2.55,2.014 18.15,22.714 ; -1.55,2.014 18.15,21.714 ; -0.55,2.014 18.15,20.714 ; 0.45,2.014 18.15,19.714 ; 1.45,2.014 18.15,18.714 ; 2.45,2.014 18.15,17.714 ; 3.45,2.014 18.15,16.714 ; 4.45,2.014 18.15,15.714 ; 5.45,2.014 18.15,14.714 ; 6.45,2.014 18.15,13.714 ; 7.45,2.014 18.15,12.714 ; 8.45,2.014 18.15,11.714 ; 9.45,2.014 18.15,10.714 ; 10.45,2.014 18.15,9.714 ; 11.45,2.014 18.15,8.714 ; 12.45,2.014 18.15,7.714 ; 13.45,2.014 18.167,6.731 ; 13.85,27.407 18.15,31.707 ; 13.85,28.407 18.15,32.707 ; 13.85,29.407 18.15,33.707 ; 13.85,30.407 18.15,34.707 ; 13.85,31.407 18.15,35.707 ; 13.85,32.407 18.15,36.707 ; 13.85,33.407 18.15,37.707 ; 13.85,34.407 18.15,38.707 ; 13.85,35.407 18.15,39.707 ; 13.85,36.407 18.15,40.707 ; 13.85,37.407 17.857,41.414 ; 13.85,38.407 16.857,41.414 ; 13.85,39.407 15.857,41.414 ; 13.85,40.407 14.857,41.414 ; 13.986,26.543 18.15,30.707 ; 14.433,1.997 18.15,5.714 ; 15.433,1.997 18.15,4.714 ; 16.433,1.997 18.15,3.714 ; 17.433,1.997 18.15,2.714
  lines w0.2: -10.55,1.413 18.15,1.413 ; -10.55,2 -10.55,41.414 18.15,41.414 18.15,2 -10.452,2 ; -6.193,26.5 13.85,26.5 ; -6.15,26.543 -6.15,41.414 ; 13.85,26.543 13.85,41.414
  text "NOTR" at -8.15,53.1 h0.8 r270
  text "SENSE 1" at -5.65,53.1 h0.8 r270
  text "SENSE 2" at -3.15,53.1 h0.8 r270
  text "SENSE 3" at -0.65,53.1 h0.8 r270
  text "SENSE 4" at 1.85,53.1 h0.8 r270
  text "SENSE 5" at 4.35,53.1 h0.8 r270
  text "SENSE 6" at 6.85,53.1 h0.8 r270
  text "SENSE 7" at 9.35,53.1 h0.8 r270
  text "SENSE 8" at 11.85,53.1 h0.8 r270
  text "NOTR" at 14.35,53.1 h0.8 r270
  text "B302BA-PCIe" at 12.85,42.3 h2
  text "220V to TTL Converter" at 13.35,26.85 h1.5
Bottom Solder:
  region: 1402 vertices and 36 holes, not listed, extent -4.909,29.142 -2.229,31.03
Board Shape:
  the board outline again, w0.1

## Text inside footprints (layer, text, board x,y; h text height)
J2: Top Overlay "1" at -7.789,0 h0.8 r90; Top Overlay "15" at -2.195,0 h0.8 r90; Top Overlay "17" at 1.811,0 h0.8 r90; Top Overlay "51" at 15.405,0 h0.8 r90